# Altium PCB pre_amp.PcbDoc
Units mil, origin at the board's own origin, x right, y up, seen from the top; angles counter-clockwise.
Board outline 6000 x 4000 mil, 2 copper layers (Top Layer, Bottom Layer); 37 components, 28 nets, 111 pads, 25 vias.
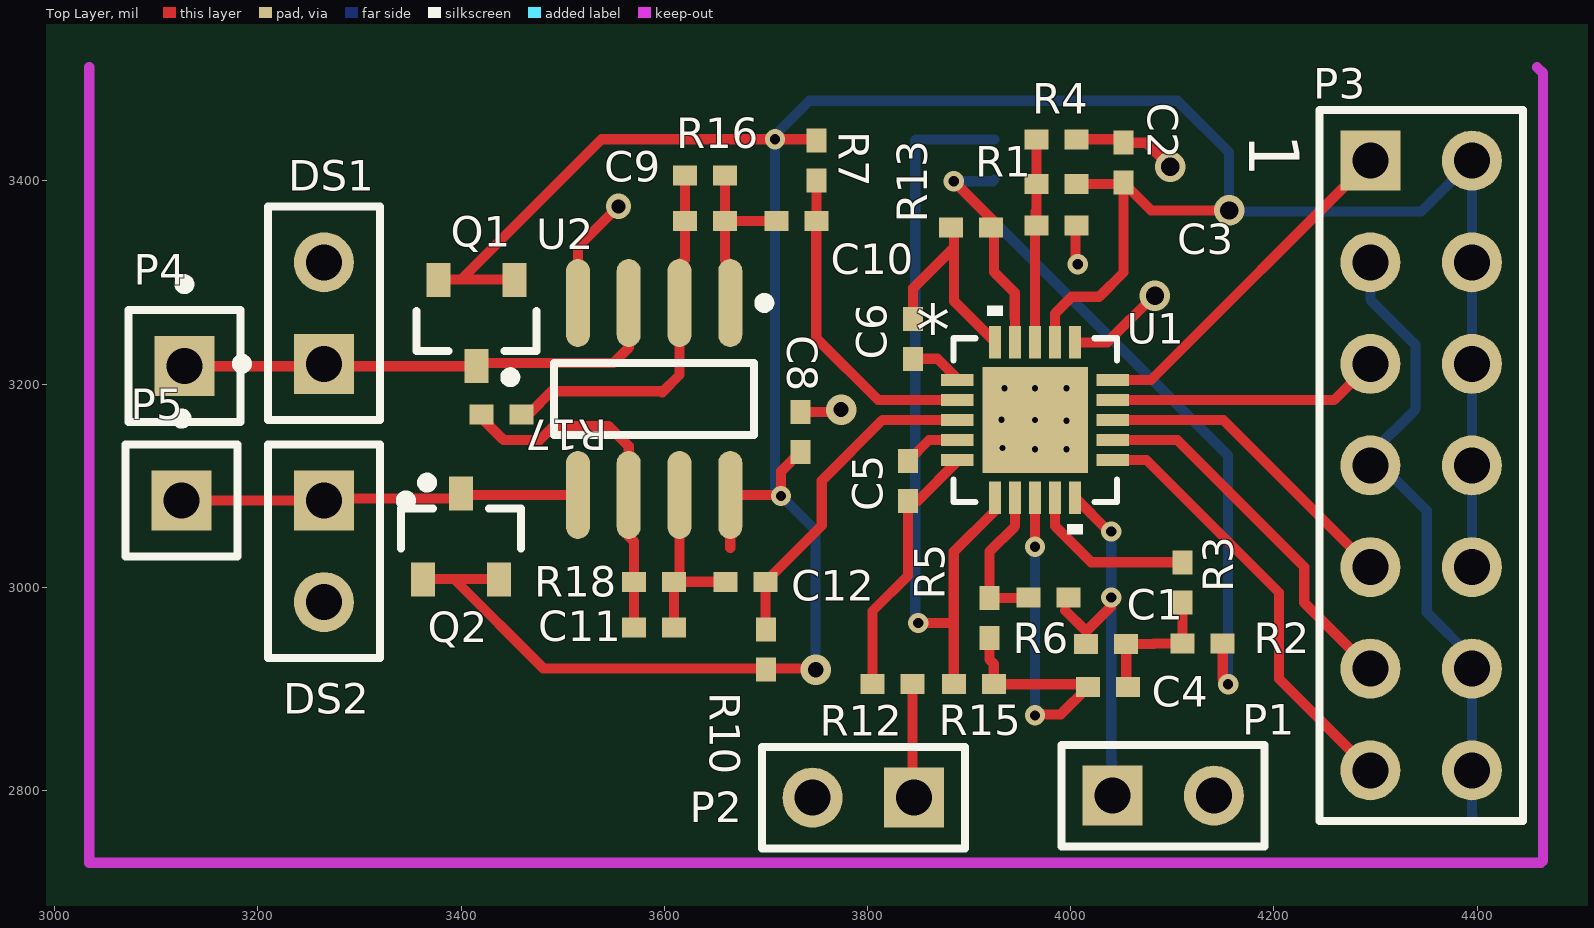
[diagram p0: Top Layer view]
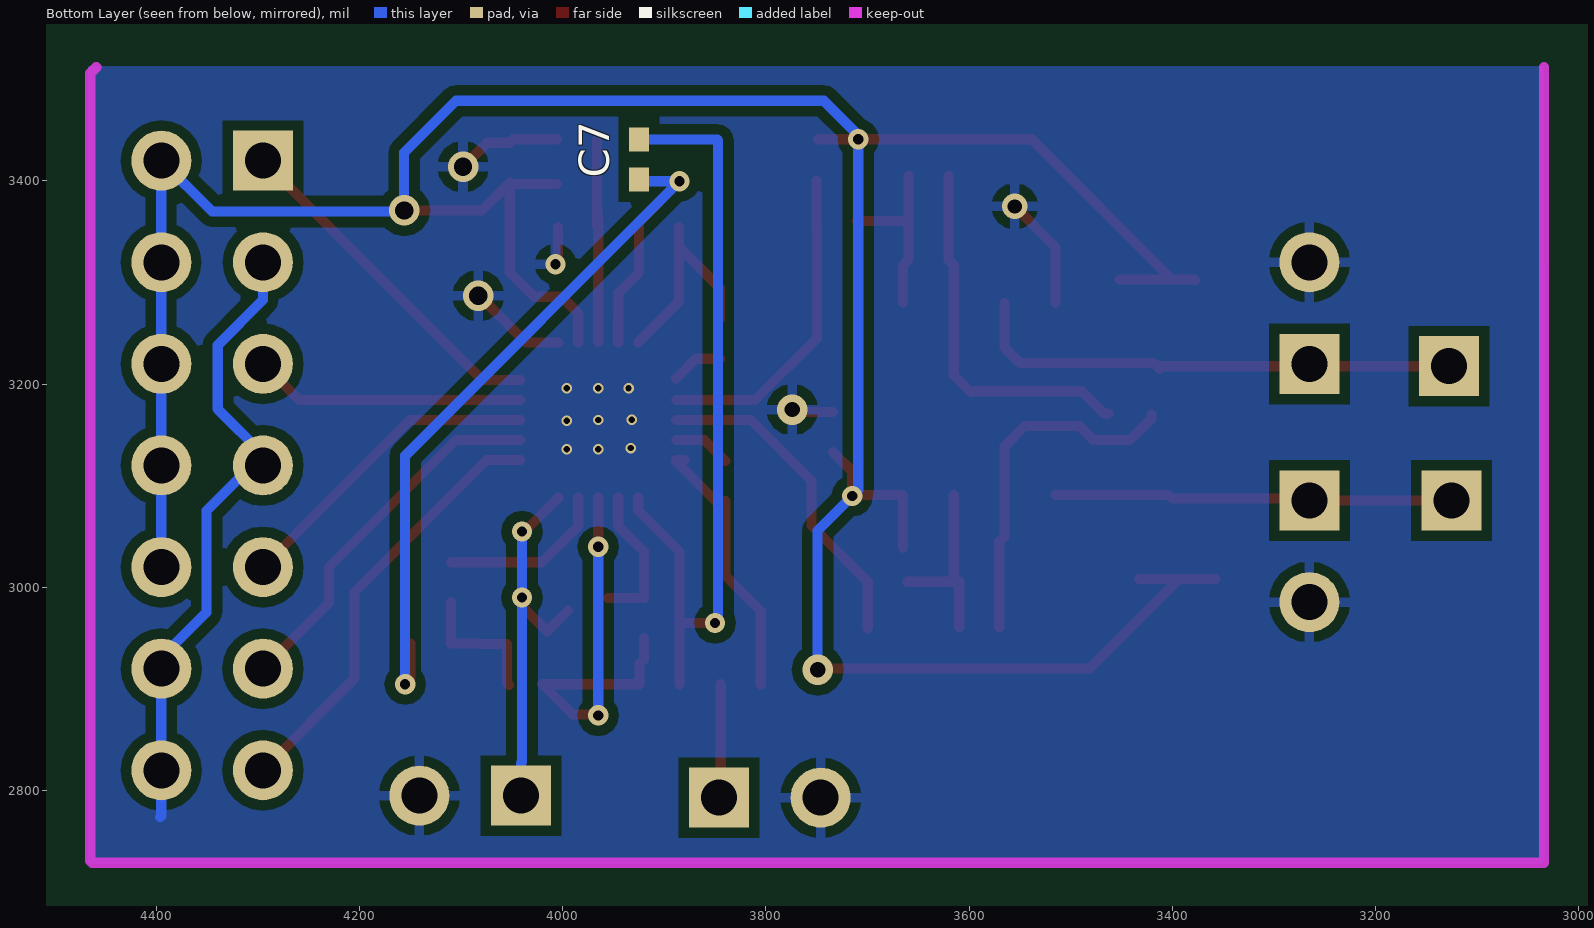
[diagram p1: Bottom Layer view, seen from below]

## Layer stack, top to bottom
Top Layer: signal copper 1.4
Dielectric: dielectric 12.6, FR-4, Dk 4.8
Bottom Layer: signal copper 1.4

## Board outline
1000,1000 7000,1000 7000,5000 1000,5000

## Design rules (kind name [scope] priority, off if disabled: settings)
Clearance [All] p1: gap=10
PolygonConnect [All] p1: connectstyle=Relief reliefconductorwidth=10 reliefentries=4 polygonreliefangle="90 Angle" airgapwidth=10
RoutingVias [All] p1: holewidth=28 width=50 viastyle="Through Hole" minholewidth=28 minwidth=50 maxholewidth=28 maxwidth=50
SilkscreenOverComponentPads [All] p1: minsilkscreentomaskgap=10
SolderMaskExpansion [All] p1: expansion=4
Width [All] p1: maxlimit=10 minlimit=10 preferedwidth=10
27 further rules are at their usual default settings.

## Classes and differential pairs
component class pre_amplify: C1 C2 C3 C4 C5 C6 C7 P1 P2 P3 R1 R2 R3 R4 R5 R6 R7 R10 R12 R13 R15 U1
component class protect: C8 C9 C10 C11 C12 DS1 DS2 P4 P5 Q1 Q2 R16 R17 R18 U2

## Components (designator, comment, footprint, x,y, rotation, side; value= is the part's Value field where it differs from the comment)
C1 "" 0402 4035,2944.37 r0 top
C2 "" 0402 4052,3418 r270 top
C3 "" 0402 3986,3356 r180 top
C4 "" 0402 4037,2902 r180 top
C5 "" 0402 3840,3104.69 r90 top
C6 "" 0402 3845,3244.69 r270 top
C7 "" 0402 3925,3421 r270 bottom
C8 "" 0402 3734,3153 r270 top
C9 "" 0402 3640,3405.51 r180 top
C10 "" 0402 3730,3360.51 r180 top
C11 "" 0402 3590,2960.51 r180 top
C12 "" 0402 3680,3005.51 r180 top
DS1 "Neon" PIN2 3265,3220 r90 top
DS2 "Neon" PIN2 3265,3085.51 r270 top
P1 "Header 2" HDR1X2 4041,2795 r0 top
P2 "Header 2" HDR1X2 3846,2793 r180 top
P3 "Header 7X2" HDR2X7 4295,3420 r270 top
P4 "Plug" PIN1 3127.68,3217.68 r0 top
P5 "Plug" PIN1 3125,3085.51 r0 top
Q1 "2N4117A/VISHAY" TO236 3400,3245 r270 top
Q2 "2N4117A/VISHAY" TO236 3415,3065 r90 top
R1 "" 0402 3986,3397 r0 top
R2 "" 0402 4130,2944.69 r180 top
R3 "" 0402 4110,3005 r90 top
R4 "" 0402 3986,3441 r180 top
R5 "" 0402 3920,2969.69 r90 top
R6 "" 0402 3978,2990 r0 top
R7 "" 0402 3750,3420 r90 top
R10 "" 0402 3700,2939 r90 top
R12 "" 0402 3824.68,2904.69 r0 top
R13 "" 0402 3902,3354 r0 top
R15 "" 0402 3904.68,2904.69 r0 top
R16 "" 0402 3640,3360.51 r0 top
R17 "" 0402 3440,3170 r180 top
R18 "" 0402 3590,3005.51 r0 top
U1 "AD8232ACPZ-R7" CP_20_10 3965,3164.69 r0 top
U2 "AD8599ARZ" ADI-R-8_N 3590,3185.51 r270 top

## Footprints (in the part's own frame and the unit in brackets; to place one, negate y for a bottom-side part, rotate by r counter-clockwise, add the part's x,y. Pads: shape width x height; smd on the part's side, far side on the other; paste and mask are expansions set on the pad)
0402 [mm] "Chip Capacitor, Body 1.0x0.5mm, IPC High Density"
  rect 0.6x0.5 smd: 1(-0.5,0) 2(0.5,0)
  body extent -0.55,-0.3 0.55,0.3, height 1.3
ADI-R-8_N [mm] "SOIC, 8-Leads, Body 4.9x3.9mm, Pitch 1.27mm, IPC Medium Density"
  oval 2.2x0.6 smd: 1(-2.4,1.905) 2(-2.4,0.635) 3(-2.4,-0.635) 4(-2.4,-1.905) 5(2.4,-1.905) 6(2.4,-0.635) 7(2.4,0.635) 8(2.4,1.905)
  silkscreen extent -2.52,-2.5 0.9,2.88, body extent -2,-2.5 2,2.5, height 1.75
CP_20_10 [mil]
  rect 32x12 smd mask+5: 1(-76.5,39.37) 2(-76.5,19.69) 3(-76.5,0) 4(-76.5,-19.68) 5(-76.5,-39.37) 11(76.5,-39.37) 12(76.5,-19.68) 13(76.5,0) 14(76.5,19.69) 15(76.5,39.37)
  rect 12x32 smd mask+5: 6(-39.37,-76.5) 7(-19.68,-76.5) 8(0,-76.5) 9(19.69,-76.5) 10(39.37,-76.5) 16(39.37,76.5) 17(19.69,76.5) 18(0,76.5) 19(-19.68,76.5) 20(-39.37,76.5)
  rect 104x104 smd mask-51.5: 21(0,0)
  silkscreen extent -80,-112 80,112
HDR1X2 [mm] "Connector; Header; 2 Position"
  rect 1.5x1.5 hole 0.9: 1(0,0)
  round 1.5 hole 0.9: 2(2.54,0)
  silkscreen extent -1.27,-1.27 3.81,1.27
HDR2X7 [mm] "Connector; Header; 7x2 Position"
  rect 1.5x1.5 hole 0.9: 1(0,0)
  round 1.5 hole 0.9: 2(0,2.54) 3(2.54,0) 4(2.54,2.54) 5(5.08,0) 6(5.08,2.54) 7(7.62,0) 8(7.62,2.54) 9(10.16,0) 10(10.16,2.54) 11(12.7,0) 12(12.7,2.54) 13(15.24,0) 14(15.24,2.54)
  silkscreen extent -1.27,-1.27 16.51,3.81
PIN1 [mm] "Connector; Plug"
  rect 1.5x1.5 hole 0.9: 1(0,0)
  silkscreen extent -1.4,-1.4 1.4,2.17
PIN2 [mm] "Photosensitive Diode; 2 Leads"
  rect 1.5x1.5 hole 0.9: 1(0,0)
  round 1.5 hole 0.9: 2(2.54,0)
  silkscreen extent -1.4,-1.4 3.94,2.17
TO236 [mm]
  rect 0.85x0.6 smd: 1(-1.456,1.331) 2(-1.456,-0.569) 3(0.694,0.381)
  silkscreen extent -0.68,-1.12 1.09,1.88, body extent -1.08,-1.12 0.32,1.88, height 1.1

## Part data
C1 C2 C3 C4 C5 C6 C7 C8 C9 C10 C11 C12: library part "Cap Semi", "Capacitor (Semiconductor SIM Model)"
DS1 DS2: "Neon Bulb"
P1 P2: "Header, 2-Pin"
P3: "Power, Control and Info Connection"
Q1 Q2: library part "JFET N"
R1 R2 R3 R4 R5 R6 R7 R10 R12 R13 R15 R16 R17 R18: library part Res3, "Resistor"
U1: "Imported"
U2: "Double Channel Wide Bandwidth Operational Amplifier, 10 MHz BW, 16 V/us SR, Industrial, 8-pin SOIC (R-8), Tube"

## Via types
v1: diameter 20, hole 10, Top Layer to Bottom Layer, 10 vias
v2: diameter 10, hole 6, Top Layer to Bottom Layer, 9 vias
v3: diameter 30, hole 18, Top Layer to Bottom Layer, 3 vias
v4: diameter 30, hole 15, Top Layer to Bottom Layer, 2 vias
v5: diameter 25, hole 14, Top Layer to Bottom Layer, 1 vias

## Nets (pads, with @x,y where several pads share a name; then routed paths per layer and width w, separated by ;. In a path a pad name is that pad's centre, name@x,y a point inside that pad or via, vN(x,y) a via of type N, cw(c..) or ccw(c..) an arc to the next point about the centre after c; other vN are vias at no path point)
AC/D\C\: P3.5 U1.14 | length 268.3
  Top Layer w10: U1.14 4259.37,3184.37 P3.5
FR: P3.1 U1.15 | length 342.9
  Top Layer w10: U1.15 4079.06,3204.06 P3.1
GND: C2.1 C3.1 C8.1 DS1.2 DS2.2 P1.2 P2.2 P3.3 P3.7 P3.12 P3.14 R4.1 U1.16 U1.21 U2.4 | length 1015.7
  Top Layer w10: U2.4 3515,3335 v5(3555,3375) ; C8.1 3771.69,3172.69 v4(3774,3175) ; U1.16 4036.19,3241.19 v3@4082.5,3287.5 ; C3.1@4004.69,3354.69 4004.69,3320.31 v1(4007,3318) ; R4.1 4048.69,3441 C2.1 4074.31,3437.69 v3(4098,3414)
  Bottom Layer w10: P3.3 4295,3282.97 4339.53,3238.44 4339.53,3175.47 4295,3130.94 4350.47,3075.47 4350.47,2975.47 4395,2930.94 P3.12 P3.14 4395,2775 4396,2774
  other v2: 3965,3136 3996,3136 3933,3137 3996,3164 3932,3165 3965,3164.69 3935,3196 3965,3196 3996,3196
  other v3: 4083,3287
I+: C10.1 R7.1 U1.2 | length 319.2
  Top Layer w10: R7.1 3750,3355.31 3749.69,3355 3749.69,3245.31 3810.63,3184.37 U1.2
I-: C12.1 R10.2 U1.3 | length 326.6
  Top Layer w10: R10.2@3700,2959.69 3699.69,2960 C12.1 3755,3060.83 3755,3105 3814.69,3164.69 U1.3
IAOUT: C7.2 R2.1 R13.2 U1.19 | length 873.2
  Top Layer w10: v1(3885,3399.69) 3924.69,3360 3924.69,3354.69 3924.69,3310.31 3945,3290 3945,3265.03 3945.32,3264.71 U1.19 ; R2.1 4149.69,2910 v1(4155,2904.69)
  Bottom Layer w10: C7.2 3923.37,3399.69 v1(3885,3399.69) 4155,3129.69 v1(4155,2904.69)
LDO+: P3.11 U1.12 | length 367.2
  Top Layer w10: U1.12 4105,3145 4230,3020 4230,2985 P3.11
LDO-: P3.13 U1.11 | length 429.8
  Top Layer w10: U1.11 4074.68,3125.32 4205,2995 4205,2910 P3.13
NetC1_2: C1.2 C4.1 R2.2 R3.1 | length 137.7
  Top Layer w10: C4.1@4052.69,2904 4054.69,2906 C1.2 4082,2944.37 4082.31,2944.69 R2.2 4110,2945 R3.1
NetC5_1: C5.1 R12.1 U1.5 | length 267.7
  Top Layer w10: R12.1 3805,2976.69 3840,3011.69 C5.1 3849.5,3085 U1.5@3888.5,3124 ; U1.5@3880.31,3125.32 U1.5
NetC5_2: C5.2 U1.4 | length 57
  Top Layer w10: C5.2 3860.63,3145 U1.4
NetC6_1: C6.1 R13.1 U1.20 | length 217.2
  Top Layer w10: C6.1 3845,3294.37 3885.32,3334.69 ; R13.1@3885.32,3354.69 3885.32,3334.69 ; U1.20 3885.32,3281.5 3885.32,3334.69
NetC6_2: C6.2 U1.1 | length 51.6
  Top Layer w10: C6.2 3868.87,3225 U1.1@3888.5,3205.37
NetC7_1: C7.1 R15.1 U1.6 | length 787.9
  Top Layer w10: v1(3850,2965) 3883,2965 ; R15.1 3885,3035 3925.63,3075.63 U1.6
  Bottom Layer w10: v1(3850,2965) 3847,2968 3847,3440 3847.69,3440.69 C7.1
NetC9_1: C9.1 C10.2 R16.2 U2.1 | length 178.3
  Top Layer w10: C9.1 R16.2 ; U2.1 3665,3317 3659.69,3322.31 R16.2 ; C10.2 R16.2
NetC9_2: C9.2 R16.1 R17.1 U2.2 | length 367.6
  Top Layer w10: R17.1@3462.69,3171 3467,3171 3489,3193 3597,3193 3598,3192 3615,3209 U2.2 3615,3317 3620.32,3322.32 R16.1 3620.32,3383 C9.2
NetC11_1: C11.1 C12.2 R18.2 U2.7 | length 181.1
  Top Layer w10: C11.1 R18.2 R18.2@3615,3005.51 ; U2.7 R18.2@3615,3005.51 ; C12.2 R18.2@3615,3005.51
NetC11_2: C11.2 R17.2 R18.1 U2.6 | length 351.7
  Top Layer w10: R17.2 3420.32,3166.5 3441.66,3145.16 3477.71,3145.16 3491.55,3159 3545,3159 3565,3139 U2.6 3565,3050.32 3570.32,3045 R18.1 3570.32,2983 C11.2
NetDS2_1: DS2.1 P5.1 Q2.3 U2.5 | length 383.3
  Top Layer w10: P5.1 DS2.1 ; DS2.1@3273.19,3087.32 3400,3087.32 3403.7,3091.02 U2.5
OP_AMP+: R3.2 U1.9 | length 167.9
  Top Layer w10: U1.9 3984.69,3060.31 4020.31,3024.69 R3.2
OP_AMP-: R5.2 R6.1 U1.7 | length 144.7
  Top Layer w10: U1.7 3945.32,3060.32 3920,3035 R5.2 3920.31,2989.69 R6.1@3955.32,2989.69
OUT: C1.1 P1.1 R6.2 U1.10 | length 382.5
  Top Layer w10: 3994.69,2977.32 4015.32,2956.69 4040,2981.37 v1(4040,2990) ; U1.10 4037.56,3055 v1(4040,3055)
  Bottom Layer w10: v1(4040,3055) v1(4040,2990) 4040,2828 4041,2827 P1.1
REFIN: C3.2 R1.1 R4.2 U1.18 | length 213.6
  Top Layer w10: U1.18@3965,3241.81 C3.2@3965,3354.37 ; C3.2@3965,3355 C3.2@3965,3354.37 ; 3965.31,3369.69 3965.31,3354.69 C3.2@3965,3354.37 ; C3.2 R1.1 R4.2
REFOUT: C4.2 R5.1 R15.2 U1.8 | length 421.2
  Top Layer w10: R5.1 3920,2929.06 3924.37,2924.69 R15.2 C4.2@4020.31,2904.69 ; v1(3965,2874) 3966,2875 3990.31,2875 C4.2 ; v1(3965,3040) U1.8
  Bottom Layer w10: v1(3965,2874) v1(3965,3040)
RLD: P2.1 R12.2 | length 112.4
  Top Layer w10: R12.2 3844.37,2794.63 P2.1
SDN: P3.9 U1.13 | length 313.4
  Top Layer w10: U1.13 4150.31,3164.69 P3.9
VIN_1-: DS1.1 P4.1 Q1.3 U2.3 | length 492.7
  Top Layer w10: P4.1 3277.68,3217.68 Q1.3 ; Q1.3@3412.32,3215 Q1.3 ; U2.3 3565,3236 3550,3221 3418.32,3221 Q1.3
VS: C2.2 C8.2 P3.2 P3.4 P3.6 P3.8 P3.10 Q1.1 Q1.2 Q2.1 Q2.2 R1.2 R7.2 R10.1 U1.17 U2.8 | length 3222.1
  Top Layer w10: Q2.1@3357.6,3008.19 3393,3008.19 ; Q1.2 3378.28,3303 3400.17,3303 ; Q2.2@3432.4,3008.19 3393,3008.19 ; Q1.1@3451.72,3303 3400.17,3303 ; 3665,3039 U2.8 ; 3680,3091 U2.8 ; C8.2 3715,3114.32 v1(3715,3090) 3713.98,3091.02 U2.8 ; v4@3747.69,2920.31 3480.88,2920.31 3393,3008.19 ; R7.2@3748.69,3441 v1(3709,3441) 3538.17,3441 3400.17,3303 ; U1.17 3984.69,3269.69 4001,3286 4028,3286 4052,3310 C2.2 ; R1.2 4050.69,3397 C2.2 ; v3(4156,3371) 4079.31,3371 C2.2
  Bottom Layer w10: v4(3749,2919) 3749,3056 v1(3715,3090) 3709,3096 v1(3709,3441) 3709,3445 3743,3479 4105,3479 4156,3428 v3(4156,3371) ; v3@4153,3370 4345,3370 P3.2 P3.4 P3.6 P3.8 P3.10

## Polygon pours and split planes (outlines as drawn)
GND on Bottom Layer "Bottom Layer-No Net" (solid, pour order 10): 3034,3513 4468,3513 4467,3512 4467,2728 3037,2728 3033,2732

## Keep-outs
Keep-Out Layer:
  lines w10: 3034,3512 3034,2729 4463,2729 4465,2731 4465,3506 4459,3512

## Text inside footprints (layer, text, board x,y; h text height)
P3: Top Overlay "1" at 4176,3447 h50 r270
U1: Top Overlay "*" at 3847.5,3228.9 h50; Mechanical 1 "32" at 3965,3164.69 h50; Mechanical 1 "1" at 3965,3164.69 h50; Mechanical 1 "*" at 3847.5,3228.9 h50